# Altium PCB Camera.PcbDoc (part 2 of 2)
Units mm, origin at the board's own origin, x right, y up, seen from the top; angles counter-clockwise.
Board outline 24 x 24 mm, 8 copper layers (Top Layer, L2 - GND, L3 - SIG, L4 - PWR, L5 - GND, L6 - SIG, L7 - GND, Bottom Layer), stack 1.6 mm thick; 103 components, 49 nets, 348 pads, 185 vias.
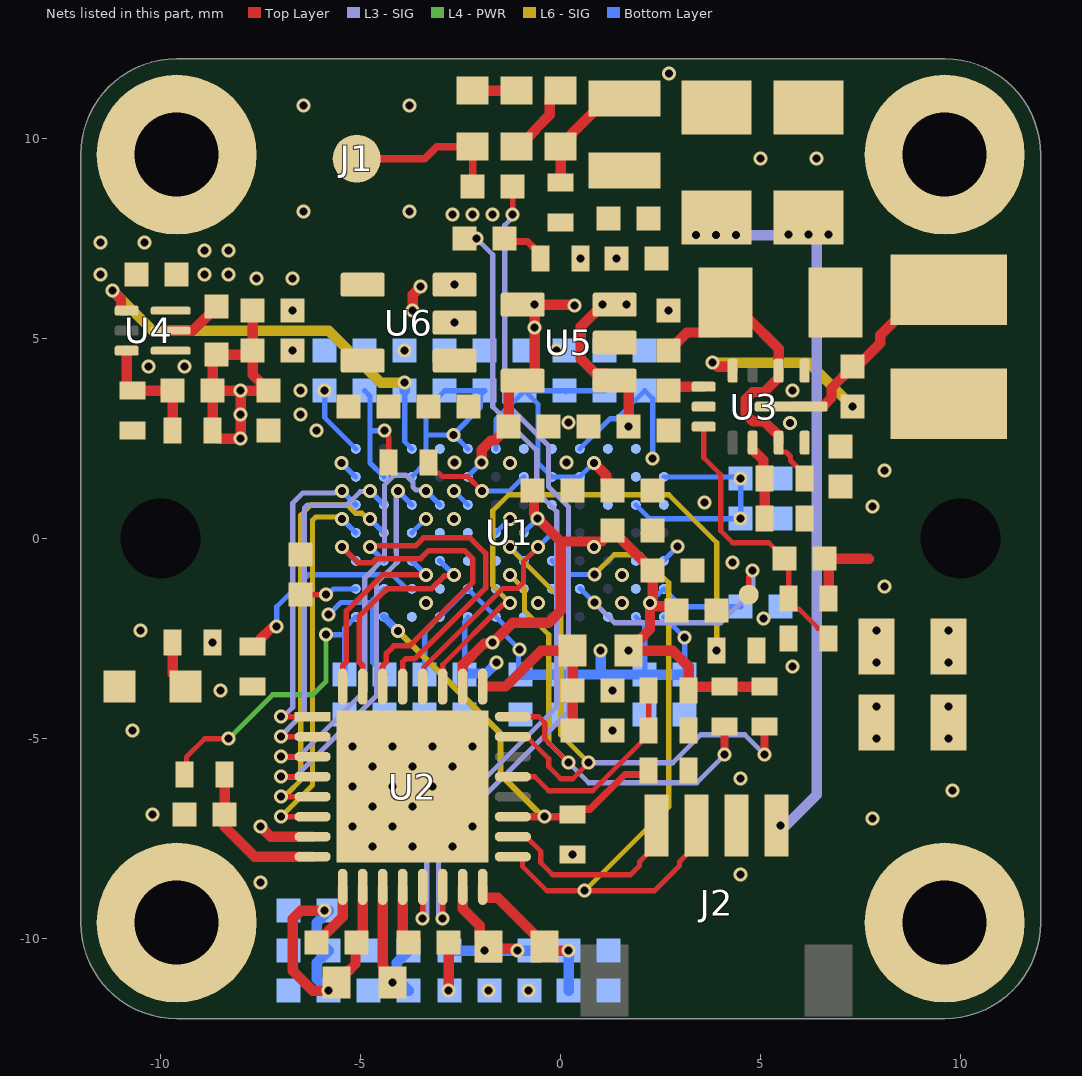
[diagram p8: the nets of this part, all layers, seen from the top]

## Part data (continued)
R13 R15 R17: library part CMP-009-00188-7, "Fixed Resistor, Metal Glaze/thick Film, 0.0625W, 100000ohm, 50V, 1% +/-Tol, 100ppm/Cel, Surface Mount, 0402", Case/Package=0402, Manufacturer Part Number=Blank, Max Operating Temperature=155°C, Min Operating Temperature=-55°C, Package Height=0.35mm, Package Length=1mm, Package Shape=Rectangular, Package Width=0.5mm, Power=62.5mW, Rated Temperature=70°C, Resistor Type="FIXED RESISTOR", Temperature Coefficient (ppm/Cel)=100, Tolerance=1%, Working Voltage=50V, Additional Feature="LASER TRIMMABLE", AECQ=No, Construction=Chip, JESD-609 Code=e3, Mounting Technology="Surface Mount", Packaging="Tape and Reel", Pins=2, Reach SVHC Compliant=Yes, RoHS Compliant=Yes, Technology="METAL GLAZE/THICK FILM", Terminal Finish=Nickel, Termination=Wraparound
R14: library part CMP-009-00247-1, "Fixed Resistor, Metal Glaze/Thick Film, 0.0625W, 43200ohm, 50V, 1% +/-Tol, Surface Mount, 0402", Case/Package=0402, Max Operating Temperature=155°C, Min Operating Temperature=-55°C, Power=62.5mW, Tolerance=1%, Voltage Rating=50V, AECQ=No, Mounting Technology="Surface Mount", Pins=2, RoHS Compliant=Yes
R16: library part CMP-009-00248-1, "Resistor, 200K, 0.1W, Thick Film, 0402;", Case/Package=0402, Max Operating Temperature=155°C, Min Operating Temperature=-55°C, Power=62.5mW, Tolerance=1%, Voltage Rating=50V, AECQ=Yes, Mounting Technology="Surface Mount", Pins=2, RoHS Compliant=Yes
R19: library part CMP-009-00225-1, "Res Thick Film 0402 330 Ohm 1% 0.063W ±100ppm/°C Molded SMD Paper T/R", Case/Package=0402, Max Operating Temperature=155°C, Min Operating Temperature=-55°C, Power=62.5mW, Tolerance=1%, AECQ=Yes, Mounting Technology="Surface Mount", Pins=2, RoHS Compliant=Yes
TP1: library part CMP-00010-1, "0.5mm circular test point", Size=0.5mm
U1: library part CMP-031-00017-2, "1/2.6-inch 2.3 Mp CMOS Digital Image Sensor with Global Shutter 2.3MP 1/2.6, Mono, 0 deg CRA", Case/Package=83-VFBGA, Max Operating Temperature=85°C, Max Supply Voltage=1.26V, Min Operating Temperature=-40°C, Min Supply Voltage=1.14V, MPN=TJA1051TK/3/1J, AECQ=Yes, Mounting Technology="Surface Mount", Pins=8
U2: library part CMP-010-00047-1, "2 MP MIPI® CSI-2 FPD-Link III serializer for 2MP/60fps cameras & radar 32-VQFN -40 to 105", Case/Package="32-VQFN (5x5)", Max Operating Temperature=105°C, Max Supply Voltage=3.6V, Min Operating Temperature=-40°C, Min Supply Voltage=800mV, Nominal Supply Current=370µA, Nominal Supply Voltage=5.7V, Output Current=6A, Mounting Technology=SMD, Pins=32, Sensor Type="Current shunt amp"
U3: library part CMP-019-00065-1, "IC REG BUCK ADJ 1.5A 12VQFN Buck Switching Regulator IC Positive Adjustable 1V 1 Output 1.5A 12-VFQFN", Case/Package="12-VQFN (3x2)", Frequency=1.7MHz, Max Operating Temperature=125°C, Max Supply Voltage=17V, Min Operating Temperature=-40°C, Min Supply Voltage=3V, Output Current=1A, Output Voltage=3.3V, Mounting Technology=SMD, Pins=12, RoHS Compliant=Yes
U4: library part CMP-019-00068-1, "IC REG BUCK ADJ 1A 6VSON Buck Switching Regulator IC Positive Adjustable 0.6V 1 Output 1A 6-VFDFN", Case/Package="6-VSON-HR (1.5x1.5)", Frequency=2.2MHz, Max Operating Temperature=125°C, Max Supply Voltage=5.5V, Min Operating Temperature=-40°C, Min Supply Voltage=2.4V, Output Current=1A, Mounting Technology=SMD, Pins=6, RoHS Compliant=Yes
U5: library part CMP-019-00066-2, "300mA ultra-low-noise low-IQ low-dropout (LDO) linear regulator with high PSRR 5-SOT-23 -40 to 125", Case/Package=SOT-23, Dropout Voltage=145mV, Frequency=1.7MHz, Max Operating Temperature=125°C, Max Supply Voltage=6V, Min Operating Temperature=-40°C, Min Supply Voltage=3.1V, Output Current=300mA, Output Voltage=2.8V, Mounting Technology=SMD, Pins=5, RoHS Compliant=Yes
U6: library part CMP-019-00067-2, "500mA high-PSRR low-IQ low-dropout voltage regulator with enable 5-SOT-23 -40 to 125", Case/Package=SOT-23, Dropout Voltage=238mV, Frequency=1.7MHz, Max Operating Temperature=125°C, Max Supply Voltage=5.5V, Min Operating Temperature=-40°C, Min Supply Voltage=1.45V, Nominal Supply Current=25µA, Output Current=500mA, Output Voltage=1.2V, Mounting Technology=SMD, Pins=5, RoHS Compliant=Yes

## Free pads (board coordinates)
  round 4 hole 2.1: MH1(-9.6,9.6) MH2(9.6,9.6) MH3(9.6,-9.6) MH4(-9.6,-9.6)

## Via types
v1: diameter 0.35, hole 0.2, Top Layer to Bottom Layer, tented both sides, 185 vias

## Nets (pads, with @x,y where several pads share a name; then routed paths per layer and width w, separated by ;. In a path a pad name is that pad's centre, name@x,y a point inside that pad or via, vN(x,y) a via of type N, cw(c..) or ccw(c..) an arc to the next point about the centre after c; other vN are vias at no path point)
1V2: C38.2 C39.2 C40.2 C41.2 C42.2 C43.2 C57.2 U1.A4 U1.A8 U1.A12 U1.B10 U1.C8 U1.D7 U1.E1 U1.F11 U1.G8 U6.4 U6.5 | length 19.4
  Bottom Layer w0.127: v1(-5.9,3.7) -5.9,3.027 U1.A12@-5.121,2.248 ; v1(-5.8,-1.9) -5.497,-1.597 -5.385,-1.597 -4.71,-1.597 ; U1.F11@-4.421,-1.252 -4.71,-1.54 -4.71,-3.09 C39.2@-4.4,-3.4 ; U1.B10@-3.721,1.548 -3.365,1.904 -3.365,2.569 ; v1(-2.681,2.593) -3.342,2.593 -3.365,2.569 ; v1(-2.671,1.198) U1.C8@-2.321,0.848 ; C40.2@-2.4,-3.4 -2.4,-2.064 -2.321,-1.985 U1.G8@-2.321,-1.952 ; U1.A8@-2.321,2.248 -2.681,2.608 -2.004,3.284 -2.004,3.596 C41.2@-1.9,3.7 C42.2@-2.9,3.7 -3.365,3.235 -3.365,2.569 ; U1.D7@-1.621,0.148 v1(-1.271,0.498) ; U1.A4@0.479,2.248 1.231,3 1.4,3 C38.2@2.1,3.7 2.3,3.5 v1(2.3,2) ; U1.E1@2.574,-0.543 v1(2.924,-0.192)
  Bottom Layer w0.254: C40.2@-2.4,-3.4 -2.368,-3.368 -1.868,-3.368 v1(-1.6,-3.1)
  other v1: -6.1,2.7 -6.5,3.1 -6.5,3.7
1V8: C6.2 C7.2 C8.2 C9.2 C10.2 C11.2 C12.2 C13.2 C14.2 C30.2 C31.2 C32.2 C33.2 C34.2 C35.2 C36.2 C37.2 C53.2 C56.2 C58.2 C62.1 C63.2 C64.2 L6.2 L7.1 L8.1 L9.1 R3.2 R4.2 R6.2 R7.1 R9.2 R12.2 R15.2 U1.A7 U1.B4 U1.B5 U1.B11 U1.D3 U1.D6 U1.D10 U1.F1 U1.G12 U2.10 U2.15 U2.26 U6.1 U6.3 | length 63.3
  Top Layer w0.127: R6.2@-9.4,-5.9 -9.359,-5.859 -9.359,-5.459 -8.9,-5 v1(-8.3,-5) ; v1(-4.4,2.7) -4.4,2.64 -4.3,2.54 R12.2@-4.3,1.9
  Top Layer w0.254: C62.1@-7.7,5.7 C64.2@-7.7,4.7 ; v1(-5.9,-9.3) -6.5,-9.3 -6.7,-9.5 -6.7,-10.8 -6.2,-11.3 v1(-5.8,-11.3) L9.1@-5.6,-11.1 -5.6,-11.05 -5.377,-10.827 -5.327,-10.827 -5.132,-10.632 -5.132,-10.132 C58.2@-5.1,-10.1 -4.95,-9.95 U2.10@-4.95,-8.703 ; v1(-3.7,5.7) -3.7,6.1 v1(-3.5,6.3) ; U2.15@-2.45,-8.703 -2.45,-9.25 -2.023,-9.677 -2.023,-9.977 L8.1@-1.8,-10.2 L8.1@-1.85,-10.25 ; U2.26@-2.45,-3.697 -2.45,-3.15 -1.918,-2.618 -1.718,-2.618 v1(-1.7,-2.6) -1.2,-2.1 -0.3,-2.1 0,-1.8 0,-0.069 ; v1(-1.9,-10.3) L8.1@-1.85,-10.25 ; v1(-1.081,-10.3) -1.107,-10.3 -1.157,-10.25 L8.1@-1.85,-10.25 ; C37.2@-0.7,1.2 -0.669,1.169 -0.669,0.626 -0.576,0.533 v1(-0.576,0.508) 0,-0.069 ; v1(0.829,1.898) 1.127,1.6 1.127,1.373 C35.2@1.3,1.2 ; v1@2.34,-1.687 2.787,-1.687 C8.2@2.9,-1.8 ; R7.1@3.2,-3.8 R7.1@3.2,-3.798 ; R4.2@5.1,-3.7 R3.2@4.1,-3.7 3.298,-3.7 R7.1@3.2,-3.798 ; C53.2@-8.7,3.7 -8.7,4.5 L6.2@-8.6,4.6 -7.8,4.6 C64.2@-7.7,4.7 ; C53.2@-8.7,3.7 R15.2@-8.7,2.7 -8.7,2.6 -8.602,2.502 -8.502,2.502 -8.5,2.5 v1(-8,2.5) v1(-8,3.1) v1(-8,3.7) ; C53.2@-8.7,3.7 v1(-8,3.7) ; v1(-8,3.7) C63.2@-7.3,3.7 -7.7,4.1 C64.2@-7.7,4.7 ; 0,-0.069 1.031,-0.069 C6.2@1.3,0.2 C7.2@2.3,-0.8 2.3,-1.505 2.229,-1.576 2.229,-2.271 1.973,-2.527 1.923,-2.527 1.7,-2.75 v1(1.7,-2.8) 2.8,-2.8 3.2,-3.2 R7.1@3.2,-3.798
  L4 - PWR w0.127: v1(-8.3,-5) -7.2,-3.9 -6.2,-3.9 -5.864,-3.564 v1(-5.864,-2.4)
  Bottom Layer w0.127: v1(-5.864,-2.4) -5.4,-2.4 ; C32.2@-5.4,-3.4 -5.4,-2.4 ; U1.G12@-5.121,-1.952 -5.4,-2.231 -5.4,-2.4 ; C36.2@-4.9,3.7 -4.769,3.569 -4.769,2.732 ; U1.B11@-4.421,1.548 -4.769,1.896 -4.769,2.732 ; v1(-4.4,2.7) -4.737,2.7 -4.769,2.732 ; U1.D10@-3.721,0.148 v1(-3.371,0.498) ; U1.A7@-1.621,2.248 -1.621,2.979 C34.2@-0.9,3.7 ; U1.D6@-0.926,0.157 v1(-0.576,0.508) ; C31.2@0.129,3.671 C31.2@0.1,3.7 ; v1(0.829,1.898) U1.B4@0.479,1.548 U1.B5@-0.221,1.548 -0.571,1.898 -0.571,3.371 C34.2@-0.9,3.7 ; v1(0.834,-0.212) U1.D3@1.184,0.139 ; C30.2@1.1,3.7 C31.2@0.1,3.7 ; v1(2.229,-1.602) U1.F1@2.579,-1.252 3.027,-1.7 C33.2@4.5,-1.7 ; C34.2@-0.9,3.7 C31.2@0.1,3.7
  Bottom Layer w0.254: v1(-5.9,-9.3) C14.2@-5.8,-9.3 -6.1,-9.6 -6.1,-10 C13.2@-5.8,-10.3 -6.1,-10.6 -6.1,-11 v1(-5.8,-11.3) ; C10.2@-2.781,-10.3 v1(-1.9,-10.3) ; C9.2@-1.781,-10.3 C11.2@-0.781,-10.3
  other v1: 0.3,-7.9 -2.65,6.35 -2.7,8.1 -2.2,8.1 -1.7,8.1
2V8: C22.2 C23.2 C24.2 C25.2 C26.2 C27.2 C28.2 C29.2 C55.2 U1.A10 U1.B1 U1.B8 U1.C2 U1.F8 U1.G1 U1.G2 U1.G7 U1.G9 U4.1 U5.4 U5.5 | length 35.7
  Top Layer w0.254: v1(-11.2,6.2) -10.99,5.99 -10.99,5.702 -10.988,5.7 U4.1@-10.85,5.7 ; v1(-1.976,1.908) -1.976,2.224 -1.741,2.459 -1.641,2.459 C55.2@-1.3,2.8 -1.3,3.777 -1.127,3.95 U5.5@-0.95,3.95 ; U5.5@-0.823,3.95 -0.65,4.123 v1(-0.65,5.275) v1(-0.65,5.85) 0.298,5.85 0.323,5.825 v1(0.349,5.825)
  L6 - SIG w0.254: v1(-11.2,6.2) -10.2,5.2 -5.8,5.2 -4.5,3.9 v1(-3.9,3.9)
  Bottom Layer w0.127: C24.2@-3.9,3.7 -3.9,2.427 U1.A10@-3.721,2.248 ; C27.2@-3.4,-3.4 -3.4,-2.331 U1.G9@-3.021,-1.952 U1.F8@-2.321,-1.252 U1.G7@-1.621,-1.952 -1.4,-2.173 -1.4,-2.4 v1(-1.027,-2.773) ; U1.B8@-2.326,1.557 v1(-1.976,1.908) ; v1@-1.054,-2.8 -1.054,-3.346 C28.2@-1,-3.4 ; U1.G2@1.879,-1.952 2.1,-2.173 C25.2@2.1,-3.4 ; U1.C2@1.879,0.848 2.227,0.5 v1(4.5,0.5) v1(4.5,1.5) 4.452,1.548 U1.B1@2.579,1.548 ; U1.G1@2.579,-1.952 v1(3.1,-2.473) C26.2@3.1,-3.4
  Bottom Layer w0.254: C24.2@-3.9,3.7 v1(-3.9,3.9) ; C28.2@-1,-3.4 C29.2@0,-3.4 0.002,-3.398 1,-3.398 ; v1(1,-2.8) 1,-3.398 ; C25.2@2.098,-3.398 1,-3.398 ; C25.2@2.1,-3.4 C26.2@3.1,-3.4
3V3: C45.1 C49.1 C50.2 C51.2 C54.2 C61.1 L5.2 R13.1 R19.1 U4.6 U5.1 U5.3 | length 6.5
  Top Layer w0.254: U5.3@1.35,5.85 v1(1.05,5.85) 1.05,5.8 0.927,5.677 0.877,5.677 0.5,5.3 0.5,4.5 0.877,4.123 1.177,4.123 U5.1@1.35,3.95 1.527,3.95 1.7,3.777 v1(1.7,2.8) ; R13.1@6.7,-1.5 6.7,-0.6 C45.1@6.6,-0.5 7.7,-0.5
  other v1: 7.9,-5 7.9,-4.2 7.9,-3.1 -8.7,-2.6 7.9,-2.3 8.1,-1.2 7.8,0.8 8.1,1.7 1.644,5.85 -8.9,6.6 -8.3,6.6 -8.9,7.2 -8.3,7.2
12V_VPOC_L1: L1.2 L2.1 | length 1.1
  Top Layer w0.254: L1.2@-2.2,11.2 L2.1@-1.1,11.2
12V_VPOC_L2: L2.2 L3.1 | length 1.9
  Top Layer w0.254: L2.2@-1.1,9.8 -1.05,9.8 -0.627,10.223 -0.627,10.244 -0.273,10.598 -0.273,10.977 -0.05,11.2 L3.1@0,11.2
12V_VPOC_L3: L3.2 L4.1 R1.1 | length 3.1
  Top Layer w0.254: R1.1@0,8.9 L3.2@0,9.8 0.05,9.8 0.273,10.023 0.273,10.123 1.15,11 L4.1@1.6,11
24V_VPOC: C1.2 C2.2 C3.2 C46.2 C47.1 C48.1 J2.1 L4.2 R1.2 R17.2 U3.2 U3.10 | length 27.3
  Top Layer w0.127: U3.10@5.45,2.4 U3.10@5.45,2.267 ; U3.10@5.512,2.206 U3.10@5.45,2.267 ; R17.2@6.1,1.5 6.1,1.6 5.745,1.955 5.745,2.055 5.631,2.169 5.512,2.169 5.45,2.231 U3.10@5.45,2.267
  Top Layer w0.254: C48.1@2.7,4.7 3.152,5.152 3.952,5.152 C46.2@4.3,5.5 ; C46.2@4.125,5.9 4.057,5.832 4.057,5.568 4.3,5.568 4.632,5.568 5.45,4.75 5.45,4.029 5.089,3.668 4.802,3.668 4.624,3.49 4.624,3.11 4.803,2.931 5.09,2.931 5.45,2.571 U3.10@5.45,2.4
  L3 - SIG w0.254: v1(3.387,7.587) v1(3.887,7.587) v1(4.387,7.587) 6.402,7.587 ; v1(5.5,-7.168) 5.518,-7.15 5.65,-7.15 6.4,-6.4 6.4,2.031 6.402,2.033 6.402,7.6 v1(6.7,7.6)
  other v1: 5.7,7.6 6.2,7.6
BUCK1V8_FB: C53.1 R15.1 R16.2 U4.3 | length 3.1
  Top Layer w0.254: U4.3@-10.85,4.7 -10.85,3.798 -10.752,3.7 R16.2@-10.7,3.7 C53.1@-9.7,3.7 R15.1@-9.7,2.7
BUCK1V8_SW: L6.1 U4.5 | length 1.4
  Top Layer w0.254: U4.5@-9.75,5.2 -9.2,5.2 L6.1@-8.6,5.8
BUCK3V3_EN: R17.1 R18.2 U3.9 | length 1.9
  Top Layer w0.254: U3.9@4.802,2.227 5.061,1.968 5.061,1.539 R17.1@5.1,1.5 R18.2@5.1,0.5
BUCK3V3_FB: C45.2 R13.2 R14.2 U3.7 | length 7.2
  Top Layer w0.127: U3.7@3.575,2.8 3.575,2.025 4,1.6 4,0.2 4.3,-0.1 5.2,-0.1 C45.2@5.6,-0.5 5.7,-0.6 R13.2@5.7,-1.5 5.7,-1.6 5.861,-1.762 5.962,-1.762 6.439,-2.238 6.539,-2.238 6.7,-2.4 R14.2@6.7,-2.5
BUCK3V3_SW: C44.2 L5.1 U3.12 | length 5.5
  Top Layer w0.254: U3.12@5.763,3.3 5.765,3.302 6.549,3.302 6.768,3.521 6.768,3.768 C44.2@7.3,4.3 7.35,4.25 7.989,4.89 7.989,5.09 9.125,6.225 L5.1@9.7,6.225
BUCK3V3_VCC: C52.2 U3.5 | length 0.9
  Top Layer w0.254: C52.2@2.7,3.7 2.8,3.8 U3.5@3.575,3.8
CAM_CAP: C21.2 U1.F12 | length 1.4
  Top Layer w0.127: C21.2@-6.5,-1.4 v1(-5.864,-1.4)
  Bottom Layer w0.127: v1(-5.864,-1.4) -5.826,-1.4 -5.678,-1.252 U1.F12@-5.121,-1.252
CAM_FLASH: J2.3 U1.E5 U2.17 | length 18.2
  Top Layer w0.127: U2.17@-1.197,-7.95 -1.013,-7.95 -0.96,-8.003 -0.96,-8.187 -0.347,-8.8 v1(0.6,-8.8) 2.343,-8.8 2.97,-8.173 2.97,-8.073 3.4,-7.643 J2.3@3.4,-7.168
  L6 - SIG w0.127: v1(0.6,-8.8) 2.7,-6.7 2.7,-1.1 2,-0.4 1.335,-0.4 v1(0.838,-0.897)
  Bottom Layer w0.127: U1.E5@-0.212,-0.547 0.138,-0.897 v1(0.838,-0.897)
CAM_RST_L: R11.2 U1.F7 U2.27 | length 14.8
  Top Layer w0.127: U2.27@-2.95,-3.697 -2.95,-3.15 -1.445,-1.645 -1.314,-1.645 v1(-1.271,-1.602)
  L6 - SIG w0.127: v1(-1.271,-1.602) -1.7,-1.173 -1.7,0.7 -1.3,1.1 2.7,1.1 3.9,-0.1 v1(3.9,-2.8)
  Bottom Layer w0.127: U1.F7@-1.621,-1.252 v1(-1.271,-1.602)
CAM_TRIGGER: U1.D5 U2.28 | length 5.4
  Top Layer w0.127: U2.28@-3.45,-3.697 -3.428,-3.675 -3.428,-3.228 -1.441,-1.241 -1.074,-1.241 -0.933,-1.099 -0.933,-0.578 v1(-0.566,-0.212)
  Bottom Layer w0.127: v1(-0.566,-0.212) U1.D5@-0.216,0.139
CLK: R9.1 R10.2 U1.G11 U2.19 | length 10.6
  Top Layer w0.185: U2.19@-1.197,-6.95 v1(-0.408,-6.95) 0.25,-6.95 0.433,-6.767 0.733,-6.767 1.606,-5.894 2.106,-5.894 R10.2@2.2,-5.8
  L6 - SIG w0.151: v1(-4.071,-2.302) -1.5,-4.873 -1.5,-5.9 -0.45,-6.95 v1(-0.408,-6.95)
  Bottom Layer w0.185: U1.G11@-4.421,-1.952 v1(-4.071,-2.302)
FPD_DATA: C4.2 J1.1 L1.1 | length 4
  Top Layer w0.185: J1.1@-5.1,9.5 -3.4,9.5 -3.1,9.8 L1.1@-2.2,9.8 C4.2@-2.2,8.8
FPD_DOUT_C_N: C5.2 R2.2 | length 1.2
  Top Layer w0.185: C5.2@-1.4,7.5 -1.331,7.431 -0.831,7.431 -0.633,7.233 -0.5,7.1 R2.2@-0.5,7
FPD_N: C5.1 U2.13 | length 20
  Top Layer w0.137: v1(-3.45,-9.492) U2.13@-3.45,-8.703
  L3 - SIG w0.128: v1@-3.45,-9.456 v1(-3.45,-9.492) -3.349,-9.391 -3.349,-7.449 -0.1,-4.2 -0.1,0.677 -0.6,1.177 -0.6,2.2 -1.7,3.3 -1.7,7.1 v1(-2.1,7.5)
FPD_P: C4.1 U2.14 | length 21.2
  Top Layer w0.137: v1(-2.95,-9.492) U2.14@-2.95,-8.703 ; v1(-1.2,8.1) C4.1@-1.2,8.8
  L3 - SIG w0.128: v1(-2.95,-9.492) -3.051,-9.391 -3.051,-7.572 0.198,-4.323 0.198,0.8 -0.302,1.3 -0.302,2.323 -1.4,3.421 -1.4,7.84 -1.2,8.04 v1(-1.2,8.1)
GND: C1.1 C2.1 C3.1 C6.1 C7.1 C8.1 C9.1 C10.1 C11.1 C12.1 C13.1 C14.1 C15.1 C16.1 C17.1 C18.1 C19.1 C20.1 C21.1 C22.1 C23.1 C24.1 C25.1 C26.1 C27.1 C28.1 C29.1 C30.1 C31.1 C32.1 C33.1 C34.1 C35.1 C36.1 C37.1 C38.1 C39.1 C40.1 C41.1 C42.1 C43.1 C46.1 C47.2 C48.2 C49.2 C50.1 C51.1 C52.1 C54.1 C55.1 C56.1 C57.1 C59.2 C60.2 C61.2 C62.2 C63.1 C64.1 D1.1 J1.S1 J1.S2 J1.S3 J1.S4 J2.2 pad.MH1 pad.MH2 pad.MH3 pad.MH4 R2.1 R5.2 R8.2 R10.1 R11.1 R14.1 R16.1 R18.1 U1.A2 U1.A3 U1.A5 U1.A6 U1.A9 U1.B2 U1.B12 U1.C1 U1.C3 U1.C5 U1.D8 U1.D9 U1.E2 U1.E7 U1.E8 U1.F2 U1.F5 U1.F9 U1.G3 U1.G6 U1.G10 U2.7 U2.33 U3.1 U3.6 U3.11 U4.4 U5.2 U6.2 | length 3.2
  Top Layer w0.254: v1(-7.5,-7.2) -7.25,-7.45 U2.7@-6.203,-7.45 ; v1(-2.8,-11.3) C59.2@-2.8,-10.1
  Bottom Layer w0.127: v1(-5.481,1.893) U1.B12@-5.13,1.543
  Bottom Layer w0.254: v1(-2.8,-11.3) C10.1@-2.781,-11.3 ; v1(-1.8,-11.3) C9.1@-1.781,-11.3 ; v1(-0.8,-11.3) C11.1@-0.781,-11.3
  other v1: -7.5,-8.6 4.5,-8.4 -4.7,-7.7 -3.7,-7.7 -2.7,-7.7 -5.2,-7.2 -4.2,-7.2 -2.2,-7.2 7.8,-7 -10.2,-6.9 -4.7,-6.7 -3.7,-6.7 9.8,-6.3 -5.2,-6.2 -4.2,-6.2 -3.2,-6.2 4.5,-6 -4.7,-5.7 -3.7,-5.7 -2.7,-5.7 -5.2,-5.2 -4.2,-5.2 -3.2,-5.2 -2.2,-5.2 9.7,-5 -10.7,-4.8 1.3,-4.8 9.7,-4.2 -8.5,-3.8 1.3,-3.8 5.8,-3.2 9.7,-3.1 -10.5,-2.3 9.7,-2.3 5.075,-2 -3.371,-1.602 -0.571,-1.602 1.529,-1.602 1.529,-0.902 4.3,-0.6 -2.671,0.498 3.6,0.9 -1.266,1.889 -2.661,1.903 0.139,1.903 0.2,2.9 5.734,2.899 5.8,3.704 -10.3,4.3 -9.4,4.3 -6.7,4.7 -3.9,4.7 -0.1,4.7 -2.65,5.4 -6.7,5.7 2.7,5.7 -7.6,6.5 -6.7,6.5 -11.5,6.6 0.5,7 1.4,7 -11.5,7.4 -10.4,7.4 -6.425,8.175 -3.775,8.175 5,9.5 6.4,9.5 -6.425,10.825 -3.775,10.825 2.712,11.625
I2C.SCL: R3.1 U1.F6 U2.24 | length 13
  Top Layer w0.127: U2.24@-1.197,-4.45 -0.55,-4.45 -0.4,-4.6 -0.4,-5 v1(0.2,-5.6)
  Top Layer w0.2: v1(4.1,-5.4) R3.1@4.1,-4.7
  L3 - SIG w0.127: v1(0.2,-5.6) 0.7,-6.1 3.4,-6.1 v1(4.1,-5.4)
  L6 - SIG w0.127: v1(-1.271,-0.902) -0.909,-1.264 -0.909,-1.791 -0.3,-2.4 -0.3,-5.1 v1(0.2,-5.6)
  Bottom Layer w0.127: v1(-1.271,-0.902) U1.F6@-0.921,-1.252
I2C.SDA: R4.1 U1.E6 U2.23 | length 14.9
  Top Layer w0.127: U2.23@-1.197,-4.95 -0.85,-4.95 -0.3,-5.5 -0.3,-5.7 0,-6 0.3,-6 v1(0.7,-5.6)
  Top Layer w0.2: v1(5.1,-5.4) R4.1@5.1,-4.7
  L3 - SIG w0.127: v1(0.7,-5.6) 2.8,-5.6 3.5,-4.9 4.6,-4.9 v1(5.1,-5.4)
  L6 - SIG w0.127: v1(-1.271,-0.202) -1.271,-0.229 0,-1.5 0,-4.9 v1(0.7,-5.6)
  Bottom Layer w0.127: v1(-1.271,-0.202) U1.E6@-0.921,-0.552
LED_3V3: D1.2 R19.2 | length 1.2
  Top Layer w0.254: R19.2@-9.7,-2.6 -9.7,-3.375 D1.2@-9.375,-3.7
LIGHT: J2.4 U2.18 | length 5
  Top Layer w0.127: U2.18@-1.197,-7.45 -0.865,-7.45 -0.5,-7.815 -0.5,-8.1 -0.2,-8.4 1.743,-8.4 1.97,-8.173 1.97,-8.073 2.4,-7.643 J2.4@2.4,-7.168
LPF1: C58.1 U2.9 | length 1.7
  Top Layer w0.254: C58.1@-6.1,-10.1 -5.45,-9.45 U2.9@-5.45,-8.703
LPF2: C59.1 U2.12 | length 1.5
  Top Layer w0.254: U2.12@-3.95,-8.703 -3.95,-9.95 C59.1@-3.8,-10.1
MIPI.CLK_N: U1.D11 U2.5 | length 10.5
  Top Layer w0.137: v1(-6.992,-6.45) U2.5@-6.203,-6.45
  L6 - SIG w0.128: v1(-6.992,-6.45) -6.932,-6.45 -6.84,-6.358 -6.821,-6.358 -6.5,-6.037 -6.5,0.588 -6.251,0.837 -5.331,0.837 -5.132,0.638 -4.971,0.638 -4.831,0.498 v1(-4.771,0.498)
  Bottom Layer w0.137: v1(-4.771,0.498) U1.D11@-4.421,0.148
MIPI.CLK_P: U1.D12 U2.6 | length 9.8
  Top Layer w0.137: v1(-6.992,-6.95) U2.6@-6.203,-6.95
  L6 - SIG w0.128: v1(-6.992,-6.95) -6.784,-6.742 -6.202,-6.16 -6.202,0.465 -6.128,0.539 -5.512,0.539 v1(-5.471,0.498)
  Bottom Layer w0.137: v1(-5.471,0.498) U1.D12@-5.121,0.148
MIPI.D0_N: U1.C9 U2.3 | length 10.8
  Top Layer w0.137: v1(-6.992,-5.45) U2.3@-6.203,-5.45
  L3 - SIG w0.128: v1(-6.992,-5.45) -6.55,-5.45 -4.9,-3.8 -4.9,-0.979 -4.41,-0.489 -4.41,1.338 -4.161,1.587 -3.866,1.587 -3.692,1.413 -3.692,1.289 -3.617,1.215 -3.388,1.215 v1(-3.371,1.198)
  Bottom Layer w0.137: v1(-3.371,1.198) U1.C9@-3.021,0.848
MIPI.D0_P: U1.C10 U2.4 | length 10
  Top Layer w0.137: v1(-6.992,-5.95) U2.4@-6.203,-5.95
  L3 - SIG w0.128: v1(-6.992,-5.95) -6.629,-5.95 -4.602,-3.923 -4.602,-1.102 -4.19,-0.69 ; v1@-4.112,1.167 -4.112,-0.346 -4.102,-0.356 -4.102,-0.602 -4.19,-0.69 ; -4.071,-0.571 -4.19,-0.69
  Bottom Layer w0.137: v1(-4.071,1.198) U1.C10@-3.721,0.848
MIPI.D1_N: U1.C12 U2.1 | length 8.1
  Top Layer w0.137: v1(-6.992,-4.45) U2.1@-6.203,-4.45
  L3 - SIG w0.128: v1(-6.992,-4.45) -6.934,-4.45 -6.7,-4.216 -6.7,0.895 -6.451,1.144 -5.657,1.144 -5.646,1.155 -5.514,1.155 v1(-5.471,1.198)
  Bottom Layer w0.137: v1(-5.471,1.198) U1.C12@-5.121,0.848
MIPI.D1_P: U1.C11 U2.2 | length 9.1
  Top Layer w0.137: v1(-6.992,-4.95) U2.2@-6.203,-4.95
  L3 - SIG w0.128: v1(-6.992,-4.95) -6.992,-4.929 -6.653,-4.59 -6.402,-4.339 -6.402,0.772 -6.328,0.847 -5.343,0.847 -5.013,1.177 -4.792,1.177 v1(-4.771,1.198)
  Bottom Layer w0.137: v1(-4.771,1.198) U1.C11@-4.421,0.848
MIPI.D2_N: U1.E9 U2.31 | length 5.1
  Top Layer w0.137: U2.31@-4.95,-3.697 -4.95,-3.176 -5.039,-3.087 -5.039,-1.939 -4.345,-1.245 -3.229,-1.245 -2.91,-0.927 -2.696,-0.927 v1(-2.671,-0.902)
  Bottom Layer w0.137: U1.E9@-3.021,-0.552 v1(-2.671,-0.902)
MIPI.D2_P: U1.E10 U2.32 | length 4.8
  Top Layer w0.137: U2.32@-5.45,-3.697 -5.45,-3.176 -5.361,-3.087 -5.361,-1.805 -4.459,-0.902 v1(-3.371,-0.902)
  Bottom Layer w0.137: U1.E10@-3.721,-0.552 v1(-3.371,-0.902)
MIPI.D3_N: U1.E11 U2.29 | length 8
  Top Layer w0.137: v1(-4.771,-0.202) -4.746,-0.177 -3.634,-0.177 -3.434,0.023 -2.266,0.023 -1.877,-0.366 -1.877,-1.234 -3.643,-3 -3.87,-3 -3.95,-3.08 U2.29@-3.95,-3.697
  Bottom Layer w0.137: v1(-4.771,-0.202) U1.E11@-4.421,-0.552
MIPI.D3_P: U1.E12 U2.30 | length 8.5
  Top Layer w0.137: v1(-5.471,-0.202) -5.073,-0.6 -4.7,-0.6 -4.6,-0.5 -3.5,-0.5 -3.3,-0.3 -2.4,-0.3 -2.2,-0.5 -2.2,-1.1 -3.777,-2.677 -4.172,-2.677 -4.361,-2.866 -4.361,-3.087 -4.45,-3.176 U2.30@-4.45,-3.697
  Bottom Layer w0.137: v1(-5.471,-0.202) U1.E12@-5.121,-0.552
MODE: R7.2 R8.1 U2.21 | length 5.2
  Top Layer w0.127: U2.21@-1.197,-5.95 -0.65,-5.95 -0.3,-6.3 0.8,-6.3 2.2,-4.9 R7.2@2.2,-3.8
NetC44_1: C44.1 U3.4 | length 4.6
  Top Layer w0.254: v1(3.8,4.4) 3.826,4.4 3.927,4.299 4.298,4.299 4.3,4.297 U3.4@4.3,4.2
  L6 - SIG w0.254: v1(3.8,4.4) 6.2,4.4 v1(7.3,3.3)
OE_L: R12.1 U1.B6 | length 2.9
  Top Layer w0.127: R12.1@-3.3,1.9 -3.3,1.8 -3.139,1.638 -3.039,1.638 -2.955,1.555 -2.328,1.555 v1(-1.971,1.198)
  Bottom Layer w0.127: v1(-1.971,1.198) -1.271,1.198 U1.B6@-0.921,1.548
PDB: C60.1 R6.1 U2.8 | length 3.8
  Top Layer w0.254: R6.1@-8.4,-5.9 C60.1@-8.4,-6.9 -8.4,-7.2 -7.65,-7.95 U2.8@-6.203,-7.95
RSVD: R5.1 U1.F10 | length 5.2
  Top Layer w0.127: R5.1@-7.702,-2.698 R5.1@-7.7,-2.7
  Top Layer w0.254: R5.1@-7.7,-2.7 -7.6,-2.7 -7.502,-2.602 -7.502,-2.502 -7.218,-2.218 -7.118,-2.218 v1(-7.1,-2.2)
  Bottom Layer w0.127: v1(-7.1,-2.2) -7.1,-1.7 -6.3,-0.9 -4.211,-0.9 -3.883,-1.228 -3.745,-1.228 U1.F10@-3.721,-1.252
SHUTTER: TP1.1 U1.F4 | length 6.1
  Top Layer w0.127: TP1.1@4.7,-1.4 4.7,-0.96 4.8,-0.86 v1(4.8,-0.8)
  L3 - SIG w0.127: v1(0.838,-1.597) 1.342,-2.1 4,-2.1 4.8,-1.3 v1(4.8,-0.8)
  Bottom Layer w0.127: U1.F4@0.488,-1.247 v1(0.838,-1.597)
VDDD: C15.2 C16.2 L7.2 U2.25 | length 4.6
  Top Layer w0.254: U2.25@-1.95,-3.697 -1.382,-3.697 -0.485,-2.8 L7.2@0.3,-2.8 C15.2@0.3,-4.8
VDDDRV: C17.2 C18.2 L8.2 U2.16 | length 4
  Top Layer w0.254: U2.16@-1.95,-8.703 -1.95,-8.968 -1.944,-8.974 -1.576,-8.974 -0.4,-10.15 L8.2@-0.4,-10.2 -0.3,-10.3 v1(0.2,-10.3)
  Bottom Layer w0.254: C17.2@0.2,-11.3 v1(0.2,-10.3)
VDDPLL: C19.2 C20.2 L9.2 U2.11 | length 3.9
  Top Layer w0.254: U2.11@-4.45,-8.703 -4.45,-10.678 -4.423,-10.705 -4.423,-10.877 v1(-4.2,-11.1)
  Bottom Layer w0.254: v1(-4.2,-11.1) -4.156,-11.1 -4.156,-11.118 -4.147,-11.127 -3.973,-11.127 C19.2@-3.8,-11.3 ; C19.2@-4.1,-11.1 -4.1,-10.6 C20.2@-3.8,-10.3
pads on no net: J2.M MP1.H1 MP1.H2 U1.A11 U1.B3 U1.B7 U1.B9 U1.C4 U1.C6 U1.C7 U1.D1 U1.D2 U1.D4 U1.E3 U1.E4 U1.F3 U1.G4 U1.G5 U2.20 U2.22 U3.3 U3.8 U4.2

## Polygon pours and split planes (outlines as drawn)
1V8 on L4 - PWR "PolygonDirect" (solid, pour order 4): -8.4,-12 2.4,-12 2.4,5.5 0.3,7.6 -0.7,8.6 -4,8.6 -8.4,4.2
3V3 on L4 - PWR "NONET_L-01_P-001" (solid, pour order 8): -12,12 -12,-12 12,-12 12,12
GND on L7 - GND "NONET_L-01_P-001" (solid, pour order 11): -12,12 -12,-12 12,-12 12,12
1V2 on L7 - GND "PolygonDirect" (solid, pour order 7): -7.3,4 -7.3,-0.5 -4.779,-3.021 -0.615,-3.021 1.424,-2.176 3.3,-0.3 3.3,2.3 2.7,2.9 -3.629,2.9 -4.9,4.1 -5.4,4.6 -6.7,4.6
2V8 on L7 - GND "PolygonDirect" (solid, pour order 9): -2.7,6.5 1,6.5 5.3,2.2 5.3,-2.8 3.8,-4.3 1.9,-4.3 -1.8,-0.6 -3.193,-0.6 -4.4,0.607 -4.4,4.8
GND on Top Layer "NONET_L-01_P-001" (solid, pour order 18): -12,12 -12,-12 12,-12 12,12
3V3 on Top Layer "PolygonDirect" (solid, pour order 2): -10.4,5.4 -10.4,6.7 -9.6,7.5 -8,7.5 -8,5.4
24V_VPOC on Top Layer "PolygonDirect" (solid, pour order 13): -0.5,7.7 -0.5,8.1 -0.2,8.4 0.1,8.4 0.6,8.9 0.6,9.8 2.6,9.8 3.4,9 5.754,9 7.3,9 7.3,7.1 5.9,7.1 5.9,3.8 4.4,3.8 3.2,5 3.2,5.5 1.8,6.9 1.8,8.6 1.1,8.6 0.5,8 0.5,7.6 -0.4,7.6
3V3 on Top Layer "PolygonDirect" (solid, pour order 12): 8.2,4.5 12,4.5 12,-1.9 8.7,-1.9 8.7,-5.6 7.1,-5.6 7.1,-2 6.5,-2 6.1,-1.6 6.1,-0.3 6.8,0.4 7,0.4 7.6,1 7.6,1.9 6.7,1.9 6.7,3
1V8 on Top Layer "PolygonDirect" (solid, pour order 15): -1.6,8.4 -2.8,8.4 -3,8.2 -3,7.6 -3.8,6.8 -3.8,6.2 -3.6,6 -2.2,6 -2,5.8 -2,5 -2.2,4.8 -3.3,4.8 -3.3,2.9 -1.9,2.9 -1.4,3.4 -1.4,8.2
1V2 on Top Layer "PolygonDirect" (solid, pour order 17): -6,6.2 -6,4.4 -6.3,4.1 -6.9,4.1 -6.9,2.9 -6.3,2.3 -5.2,2.3 -4.3,3.2 -4.3,6.6 -4.4,6.7 -5.5,6.7
GND on L2 - GND "NONET_L-01_P-001" (solid, pour order 0): -12,12 -12,-12 12,-12 12,12
GND on L3 - SIG "NONET_L-01_P-001" (solid, pour order 3): -12,12 -12,-12 12,-12 12,12
GND on L5 - GND "NONET_L-01_P-001" (solid, pour order 5): -12,12 -12,-12 12,-12 12,12
GND on Bottom Layer "NONET_L-01_P-001" (solid, pour order 16): -12,12 -12,-12 12,-12 12,12
GND on L6 - SIG "NONET_L-01_P-001" (solid, pour order 6): -12,12 -12,-12 12,-12 12,12

## Other copper
Top Layer:
  region net GND: -3.125,10.18 -4.045,10.18 -4.058,10.2 -4.068,10.214 -4.078,10.229 -4.088,10.243 -4.098,10.257 -4.109,10.27 -4.12,10.284 -4.131,10.298 -4.142,10.311 -4.153,10.324 -4.165,10.337 -4.176,10.35 -4.188,10.363 -4.2,10.375 -4.212,10.388 -4.225,10.4 -4.237,10.412 -4.25,10.424 -4.263,10.435 -4.276,10.447 -4.289,10.458 -4.302,10.469 -4.316,10.48 -4.33,10.491 -4.343,10.502 -4.357,10.512 -4.371,10.522 -4.386,10.532 -4.4,10.542 -4.42,10.555 -4.42,11.475 -3.125,11.475
  region net GND: -3.125,7.525 -4.42,7.525 -4.42,8.445 -4.4,8.458 -4.386,8.468 -4.371,8.478 -4.357,8.488 -4.343,8.498 -4.33,8.509 -4.316,8.52 -4.302,8.531 -4.289,8.542 -4.276,8.553 -4.263,8.565 -4.25,8.576 -4.237,8.588 -4.225,8.6 -4.212,8.612 -4.2,8.625 -4.188,8.637 -4.176,8.65 -4.165,8.663 -4.153,8.676 -4.142,8.689 -4.131,8.702 -4.12,8.716 -4.109,8.73 -4.098,8.743 -4.088,8.757 -4.078,8.771 -4.068,8.786 -4.058,8.8 -4.045,8.82 -3.125,8.82
  region net GND: -5.78,10.555 -5.8,10.542 -5.814,10.532 -5.829,10.522 -5.843,10.512 -5.857,10.502 -5.87,10.491 -5.884,10.48 -5.898,10.469 -5.911,10.458 -5.924,10.447 -5.937,10.435 -5.95,10.424 -5.963,10.412 -5.975,10.4 -5.988,10.388 -6,10.375 -6.012,10.363 -6.024,10.35 -6.035,10.337 -6.047,10.324 -6.058,10.311 -6.069,10.298 -6.08,10.284 -6.091,10.27 -6.102,10.257 -6.112,10.243 -6.122,10.229 -6.132,10.214 -6.142,10.2 -6.155,10.18 -7.075,10.18 -7.075,11.475 -5.78,11.475
  region net GND: -6.142,8.8 -6.132,8.786 -6.122,8.771 -6.112,8.757 -6.102,8.743 -6.091,8.73 -6.08,8.716 -6.069,8.702 -6.058,8.689 -6.047,8.676 -6.035,8.663 -6.024,8.65 -6.012,8.637 -6,8.625 -5.988,8.612 -5.975,8.6 -5.963,8.588 -5.95,8.576 -5.937,8.565 -5.924,8.553 -5.911,8.542 -5.898,8.531 -5.884,8.52 -5.87,8.509 -5.857,8.498 -5.843,8.488 -5.829,8.478 -5.814,8.468 -5.8,8.458 -5.78,8.445 -5.78,7.525 -7.075,7.525 -7.075,8.82 -6.155,8.82

## Silkscreen, mask and mechanical layers (free items; w line width, h text height)
Top Overlay:
  circle w0.65: c-10,0 r1.45
  circle w0.65: c10,0 r1.45
Board Shape:
  the board outline again, w0.2
Notes (Mech3):
  circle w0.1: c-10,0 r1.75
  circle w0.1: c10,0 r1.75
  circle w0.1: c0,0 r0.532
  lines w0.05: -1.271,0.148 0,0.148 0,0

## Dimensions
-10,0 to 10,0 on Notes (Mech3)
9.6,-12 to 9.6,12 on Notes (Mech3)
-12,9.6 to 12,9.6 on Notes (Mech3)